# Altium PCB Mako DSP R1.3.PcbDoc (part 1 of 2)
Units mil, origin at the board's own origin, x right, y up, seen from the top; angles counter-clockwise.
Board outline 4040 x 2100 mil, 4 copper layers (Top Layer, GND, Power, Bottom Layer); 159 components, 140 nets, 610 pads, 250 vias.
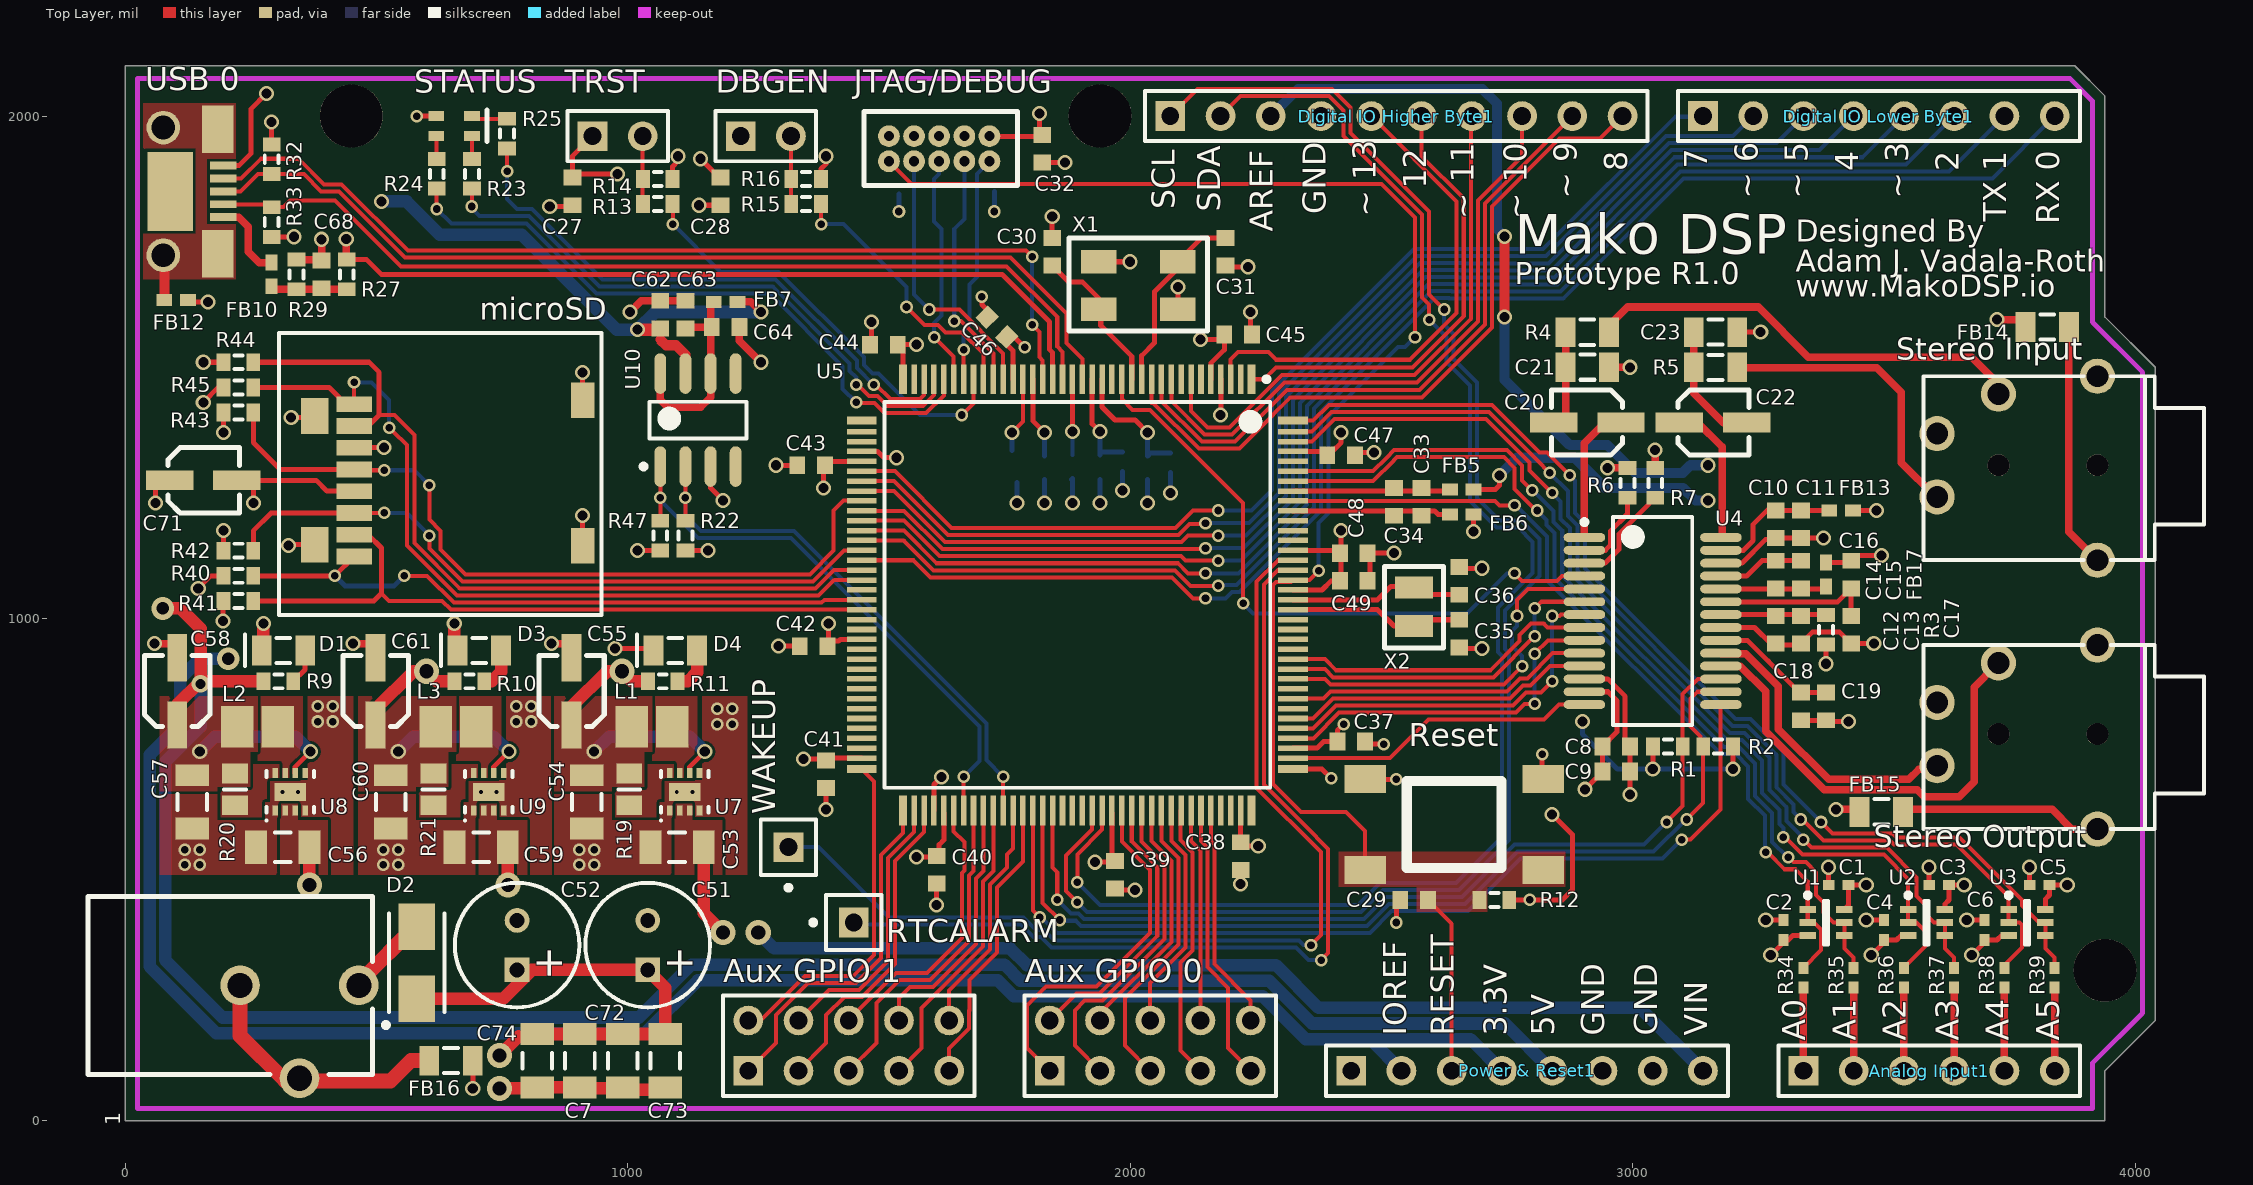
[diagram p0: Top Layer view]
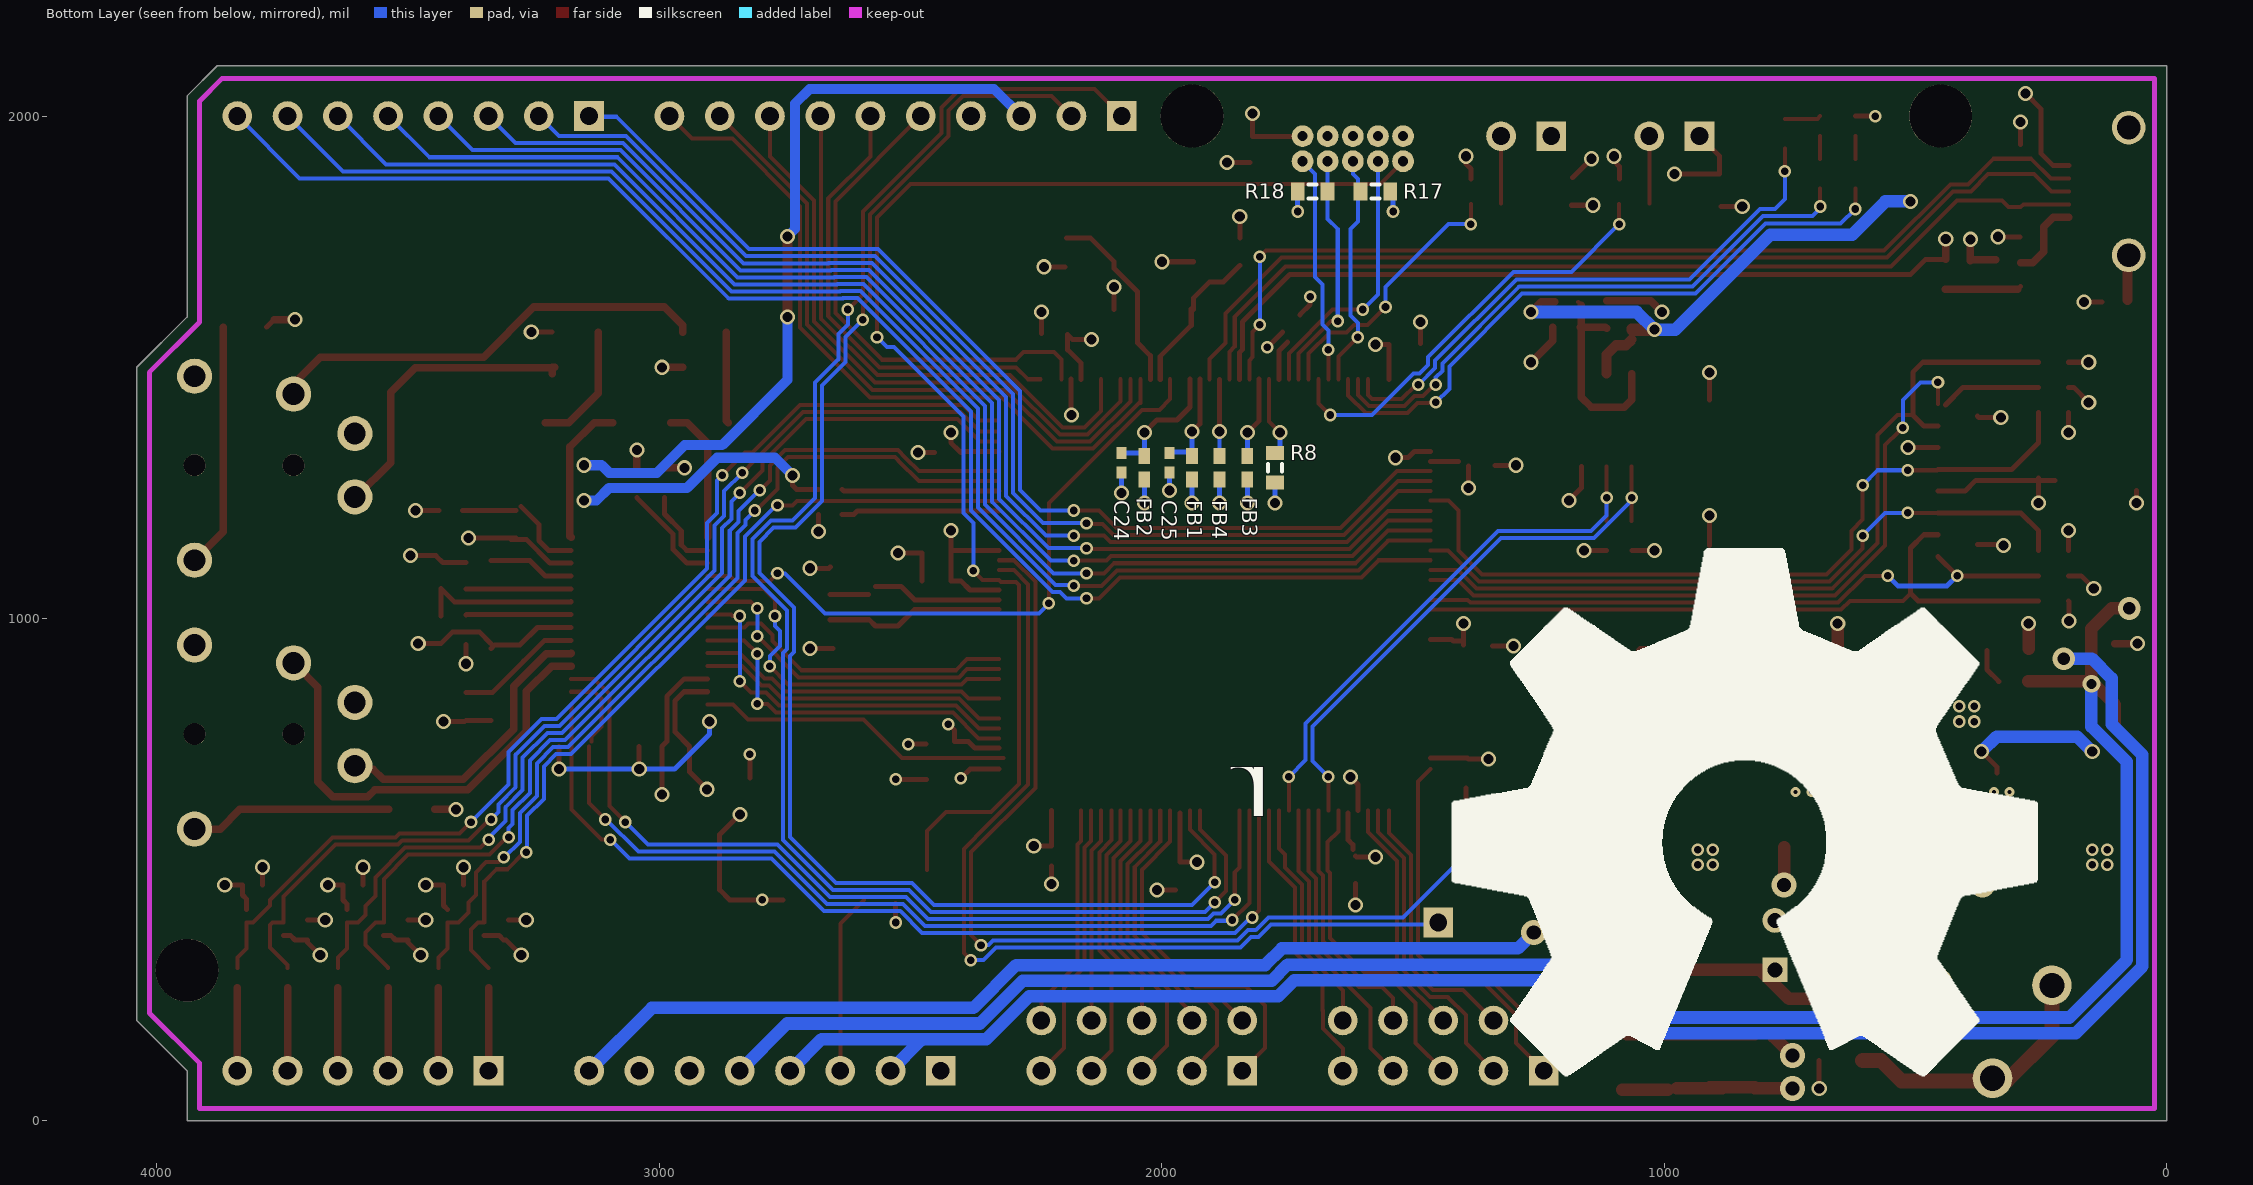
[diagram p1: Bottom Layer view, seen from below]
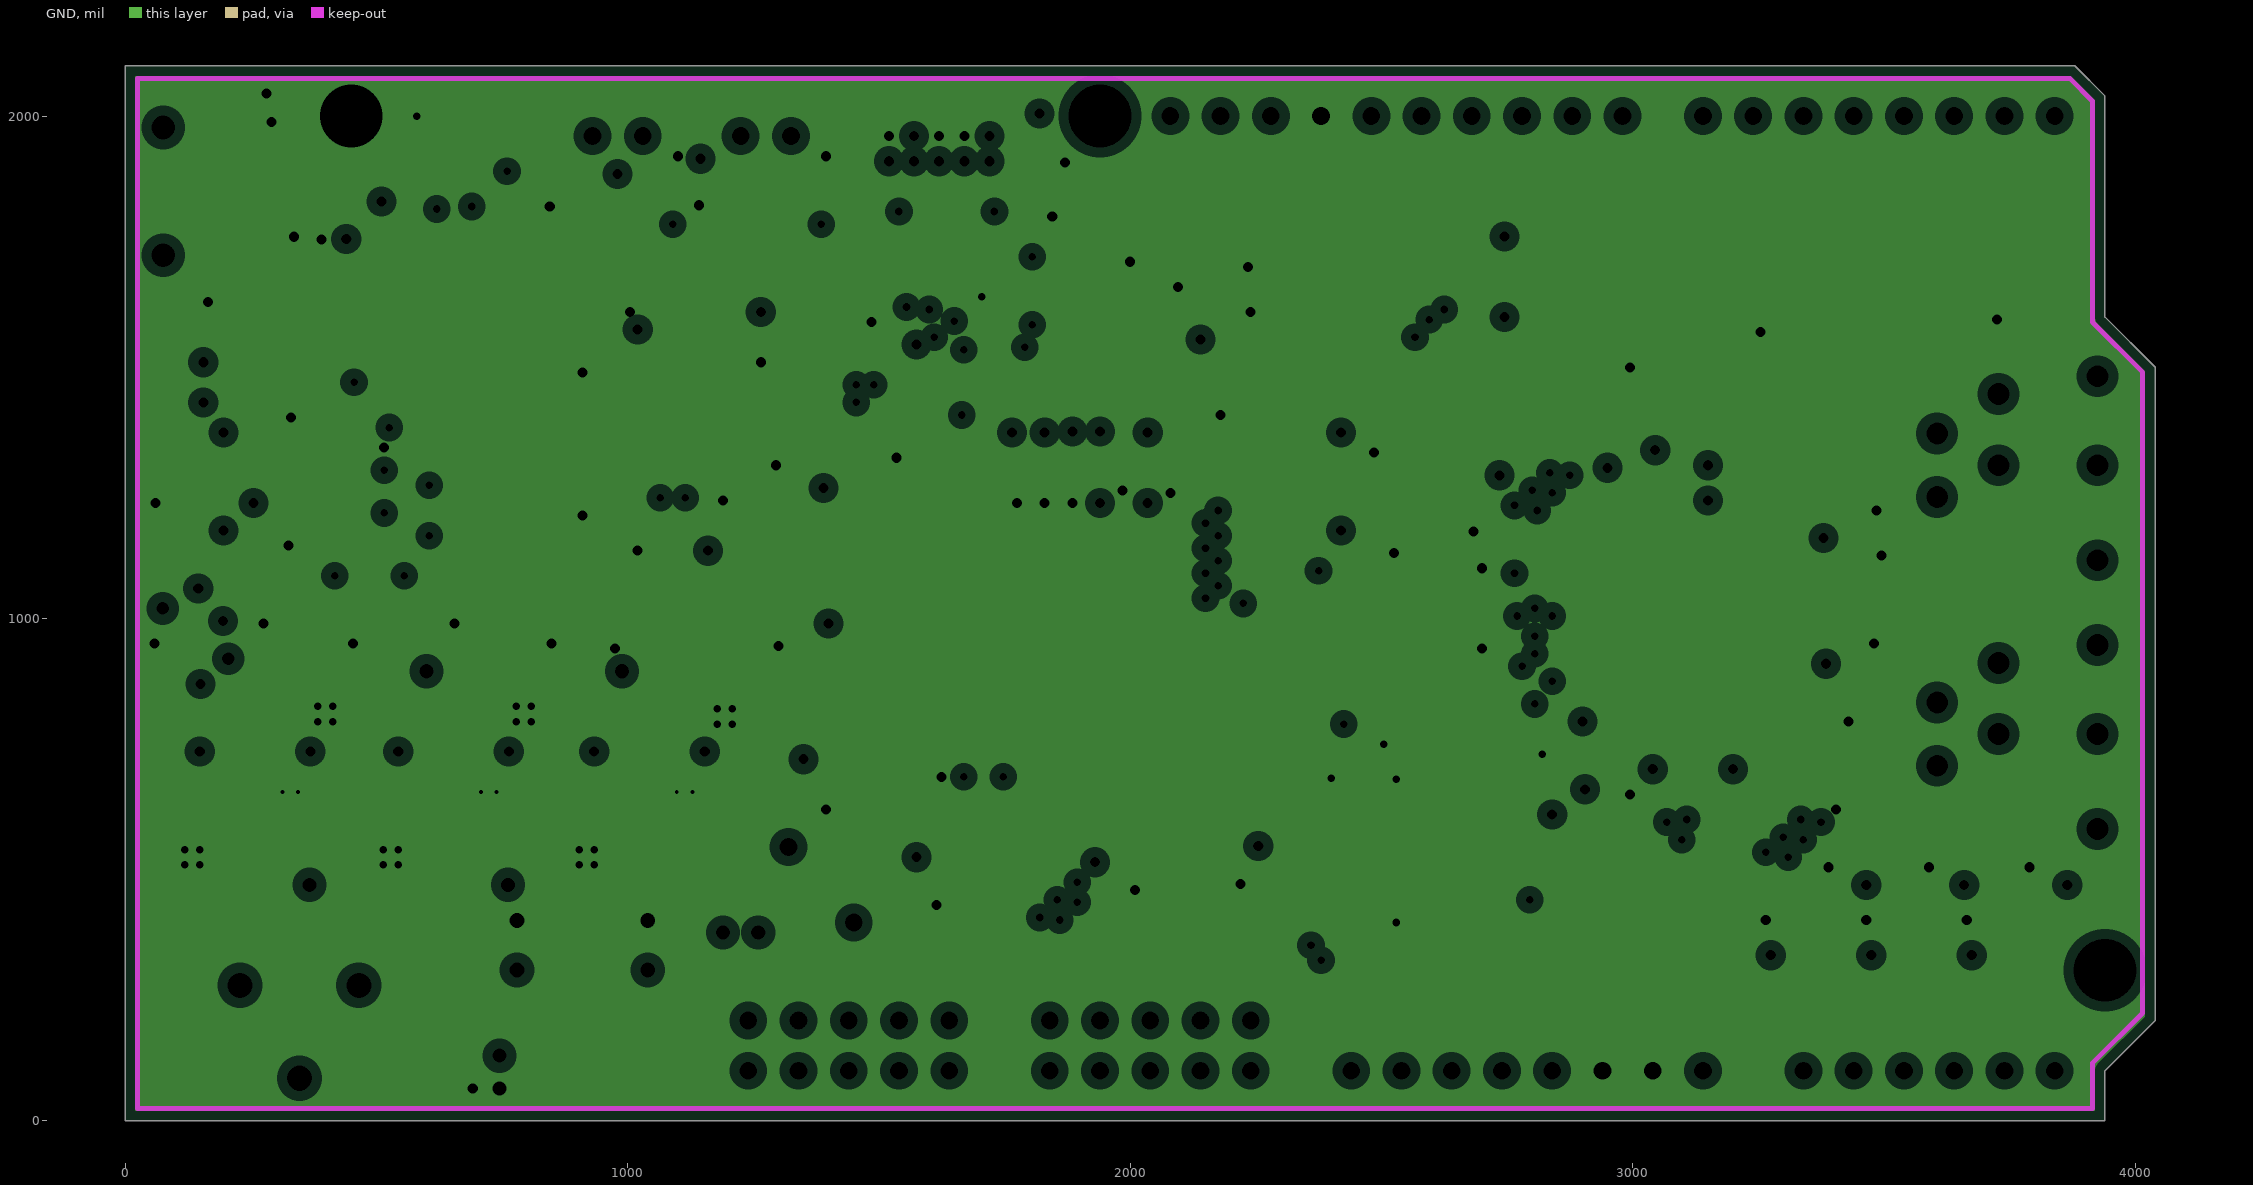
[diagram p2: GND, clearances drawn from the general rule]
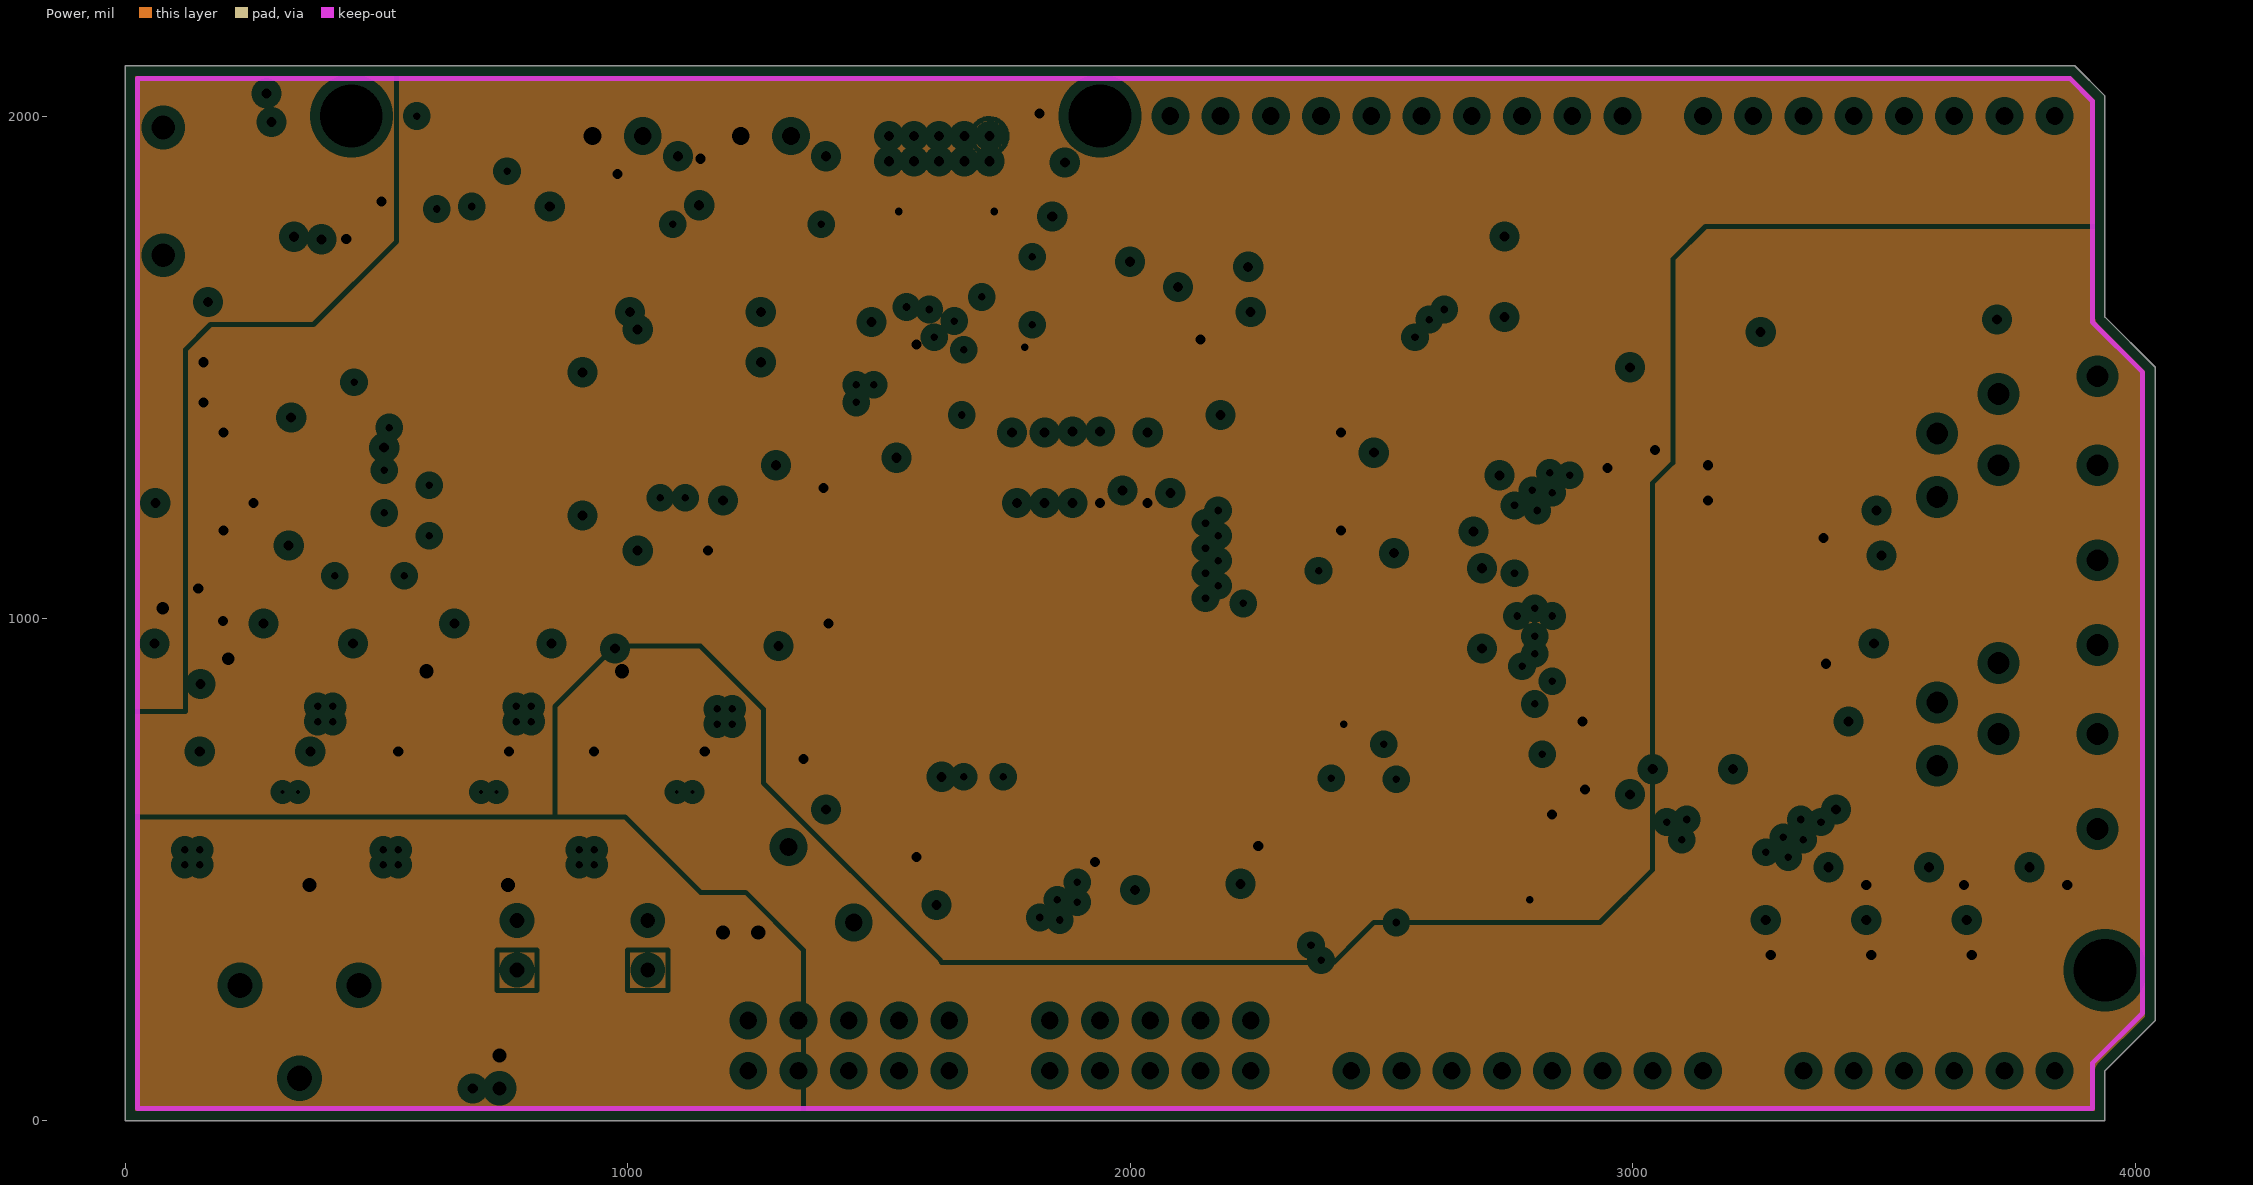
[diagram p3: Power, clearances drawn from the general rule]

## Layer stack, top to bottom
Top Layer: signal copper 1.4
Dielectric: core 12.6, FR-4, Dk 4.8
GND: plane copper 1.4, net GND
Dielectric: prepreg 12.6, FR-4, Dk 4.8
Power: plane copper 1.4, net (Multiple Nets)
Dielectric: core 12.6, FR-4, Dk 4.8
Bottom Layer: signal copper 1.4

## Board outline
0,0 0,2100 3880,2100 3940,2040 3940,1600 4040,1500 4040,200 3940,100 3940,0

## Design rules (kind name [scope] priority, off if disabled: settings)
Clearance [All] p1: gap=6
ComponentClearance [All] p1: gap=0 collisioncheckmode=3 verticalgap=10 showdistances=FALSE
DiffPairsRouting [All] p1: maxlimit=10 minlimit=10 mostfreqgap=10 maxuncoupledlength=500
FanoutControl Fanout_SOIC [(InComponent('U8') AND InComponent('U7'))] p3: bgadir=Out bgaviamode=Centered fanoutstyle=Staggered fanoutdirection=Alternating viagrid=1 // Fanout_SOIC (Default Rule)
FanoutControl Fanout_Small [All] p4: bgadir=Out bgaviamode=Centered fanoutstyle=Auto fanoutdirection=Alternating viagrid=1 // Fanout_Small (Default Rule)
HoleSize [All] p1: absolutevalues=TRUE maxlimit=120 minlimit=1 maxpercent=80.000 minpercent=20.000
MinimumSolderMaskSliver [All] p1 off: minsoldermaskwidth=10
PlaneClearance [All] p1: clearance=20
PlaneConnect [All] p1: planeconnectstyle=Direct reliefexpansion=20 reliefentries=4 reliefconductorwidth=10 reliefairgap=10
PolygonConnect [All] p1: connectstyle=Direct reliefconductorwidth=45 reliefentries=4 polygonreliefangle="90 Angle" airgapwidth=10
RoutingVias [All] p1: holewidth=15 width=25 viastyle="Through Hole" minholewidth=15 minwidth=25 maxholewidth=28 maxwidth=50
SilkToSilkClearance [All] p1 off: silktosilkclearance=10
SilkToSolderMaskClearance SilkscreenOverComponentPads [IsPad] p1 off: minsilkscreentomaskgap=10 clearancetoexposedcopper=TRUE
SolderMaskExpansion [All] p1: expansion=4
Width [All] p1: maxlimit=30 minlimit=6 preferedwidth=6 minimp=50.000000 maximp=50.000000 favimp=50.000000
18 further rules are at their usual default settings.

## Classes and differential pairs
component class "Mako DSP Power R1.2": 1 12VDC/VCCIN C7 C51 C52 C53 C54 C55 C56 C57 C58 C59 C60 C61 C72 C73 C74 D1 D2 D3 D4 D? FB16 L1 L2 L3 L? R9 R10 R11 R19 R20 R21 U7 U8 U9
component class "Mako DSP Arduio IO R1.2": "Analog Input1" "Analog Input?" "Aux GPIO 0" "Aux GPIO 1" C1 C2 C3 C4 C5 C6 "Digital IO Higher Byte1" "Digital IO Higher Byte?" "Digital IO Lower Byte1" "Digital IO Lower Byte?" "Power & Reset1" "Power & Reset?" R34 R35 R36 R37 R38 R39 SSP? U1 U2 U3
component class "Mako DSP Audio Codec R1.2": C8 C9 C10 C11 C12 C13 C14 C15 C16 C17 C18 C19 C20 C21 C22 C23 FB13 FB14 FB15 FB17 R1 R2 R3 R4 R5 R6 R7 "Stereo Input" "Stereo Input?" "Stereo Output" "Stereo Output?" U4
component class "Mako DSP Main R1.2": C24 C25 C27 C28 C29 C30 C31 C32 C33 C34 C35 C36 C37 C38 C39 C40 C41 C42 C43 C44 C45 C46 C47 C48 C49 C71 DBGEN FB1 FB2 FB3 FB4 FB5 FB6 "ISP PGM" JTAG/DEBUG microSD R8 R12 R13 R14 R15 R16 R17 R18 R23 R24 R25 R40 R41 R42 R43 R44 R45 RESET Reset RTCALARM STATUS TRST U5 WAKEUP X1 X2
component class "Mako DSP USBR1.2": C62 C63 C64 C68 FB7 FB10 FB12 R22 R27 R29 R32 R33 R47 U10 "USB 0"
differential pair USB0: +USB0_P -USB0_N

## Components (designator, comment, footprint, x,y, rotation, side; value= is the part's Value field where it differs from the comment)
1 "Center-positive 2.1 mm power jack" PJ-102AH 465,270 r90 top
"Analog Input1" "Arduino Leonardo Analog" "Arduino Leonardo Analog" 3340,100 r0 top locked
"Aux GPIO 0" "Header 5X2" HDR2X5 1840,100 r0 top locked
"Aux GPIO 1" "Header 5X2" HDR2X5 1240,100 r0 top locked
C1 "Cap Semi" 0402 3410,470 r0 top
C2 "Cap Semi" 0402 3300,380 r270 top
C3 "Cap Semi" 0402 3610,470 r0 top
C4 "Cap Semi" 0402 3500,380 r270 top
C5 "Cap Semi" 0402 3810,470 r0 top
C6 "Cap Semi" 0402 3700,380 r270 top
C7 "Cap Semi" C1206 905,120 r90 top
C8 "Cap Semi" 1608[0603] 2967.56,745.31 r180 top
C9 "Cap Semi" 1608[0603] 2967.56,695.31 r180 top
C10 "Cap Semi" 1608[0603] 3285,1187.56 r270 top
C11 "Cap Semi" 1608[0603] 3335,1187.56 r270 top
C12 "Cap Semi" 1608[0603] 3285,977.56 r90 top
C13 "Cap Semi" 1608[0603] 3335,977.56 r90 top
C14 "Cap Semi" 1608[0603] 3285,1087.56 r90 top
C15 "Cap Semi" 1608[0603] 3335,1087.56 r90 top
C16 "Cap Semi" 1608[0603] 3435,1087.56 r270 top
C17 "Cap Semi" 1608[0603] 3435,977.56 r90 top
C18 "Cap Semi" 1608[0603] 3335,825 r90 top
C19 "Cap Semi" 1608[0603] 3385,825 r90 top
C20 "Cap Semi" "Panasonic VS B" 2910,1390 r0 top
C21 "Cap Semi" "SM 0805 - gap trimmed" 2910,1500 r180 top
C22 "Cap Semi" "Panasonic VS B" 3160,1390 r180 top
C23 "Cap Semi" "SM 0805 - gap trimmed" 3165,1570 r180 top
C24 "Cap Semi" 0402 2080,1310 r90 bottom
C25 "Cap Semi" 0402 1985,1310 r90 bottom
C27 "Cap Semi" CAPC1608L 890,1850 r90 top
C28 "Cap Semi" CAPC1608L 1185,1850 r90 top
C29 "Cap Semi" CAPC1608L 2565,440 r0 top
C30 "Cap Semi" 1608[0603] 1845,1730 r90 top
C31 "Cap Semi" 1608[0603] 2190,1730 r90 top
C32 "Cap Semi" CAPC1608L 1825,1935 r270 top
C33 "Cap Semi" 1608[0603] 2580,1232.05 r90 top
C34 "Cap Semi" 1608[0603] 2525,1232.05 r90 top
C35 "Cap Semi" 1608[0603] 2655,970 r90 top
C36 "Cap Semi" 1608[0603] 2655,1075 r270 top
C37 "Cap Semi" 1608[0603] 2440,755 r180 top
C38 "Cap Semi" 1608[0603] 2220,527.05 r90 top
C39 "Cap Semi" 1608[0603] 1970,490 r90 top
C40 "Cap Semi" 1608[0603] 1615,500 r90 top
C41 "Cap Semi" 1608[0603] 1395,690 r90 top
C42 "Cap Semi" 1608[0603] 1370,945 r0 top
C43 "Cap Semi" 1608[0603] 1365,1305 r0 top
C44 "Cap Semi" 1608[0603] 1510,1545 r0 top
C45 "Cap Semi" 1608[0603] 2215,1565 r180 top
C46 "Cap Semi" 1608[0603] 1735,1580 r315 top
C47 "Cap Semi" 1608[0603] 2420,1325 r180 top
C48 "Cap Semi" 1608[0603] 2445,1130 r180 top
C49 "Cap Semi" 1608[0603] 2445,1075 r180 top
C51 "Cap Pol1" CAPPR2.5-6.3x5 1040,350 r90 top
C52 "Cap Pol1" CAPPR2.5-6.3x5 780,350 r90 top
C53 "Cap Semi" C1206 1098.48,545 r0 top
C54 "Cap Semi" C1206 918.48,635 r90 top
C55 "Cap Semi" "Panasonic VS B" 888.48,855 r270 top
C56 "Cap Semi" C1206 313.48,545 r0 top
C57 "Cap Semi" C1206 133.48,635 r90 top
C58 "Cap Semi" "Panasonic VS B" 103.48,855 r270 top
C59 "Cap Semi" C1206 708.48,545 r0 top
C60 "Cap Semi" C1206 528.48,635 r90 top
C61 "Cap Semi" "Panasonic VS B" 498.48,855 r270 top
C62 "Cap Semi" 1608[0603] 1065,1605 r270 top
C63 "Cap Semi" 1608[0603] 1115,1605 r270 top
C64 "Cap Semi" 1608[0603] 1195,1580 r180 top
C68 "Cap Semi" 1608[0603] 390.96,1684.74 r270 top
C71 "Cap Semi" "Panasonic VS B" 155.47,1275 r180 top
C72 "Cap Semi" C1206 990,120 r90 top
C73 "Cap Semi" C1206 1075,120 r90 top
C74 "Cap Semi" C1206 820,120 r90 top
D1 "LED2" "SM 0805 polarized" 235,980 r0 top
D2 "PMEG4050EP" PMEG4050EP 580,315 r90 top
D3 "LED2" "SM 0805 polarized" 625,980 r0 top
D4 "LED2" "SM 0805 polarized" 1015,980 r0 top
DBGEN "Header 2" HDR1X2 1225,1960 r0 top (schematic designator DBGEN1)
"Digital IO Higher Byte1" "Arduino Leonardo High Byte" "Arduino Leonardo High Byte" 2080,2000 r0 top locked
"Digital IO Lower Byte1" "Arduino Leonardo Low Byte" "Arduino Leonardo Low Byte" 3140,2000 r0 top locked
FB1 "BLM15HG601SN1D" BLM18PG121SN1D 1940,1300 r90 bottom
FB2 "BLM15HG601SN1D" BLM18PG121SN1D 2035,1300 r90 bottom
FB3 "BLM15HG601SN1D" BLM18PG121SN1D 1830,1300 r270 bottom
FB4 "BLM15HG601SN1D" BLM18PG121SN1D 1885,1300 r270 bottom
FB5 "BLM15HG601SN1D" BLM18PG121SN1D 2660,1257.05 r180 top
FB6 "BLM15HG601SN1D" BLM18PG121SN1D 2660,1207.05 r180 top
FB7 "BLM15HG601SN1D" BLM18PG121SN1D 1195,1630 r0 top
FB10 "BLM15HG601SN1D" BLM18PG121SN1D 290.96,1684.74 r90 top
FB12 "BLM15HG601SN1D" BLM18PG121SN1D 101.54,1634.02 r0 top
FB13 "BLM15HG601SN1D" BLM18PG121SN1D 3415.16,1215.16 r0 top
FB14 "Ferrite" "SM 0805 - gap trimmed" 3825,1580 r180 top
FB15 "Ferrite" "SM 0805 - gap trimmed" 3495,615 r180 top
FB16 "Ferrite" "SM 0805 - gap trimmed" 648.48,120 r180 top
FB17 "BLM15HG601SN1D" BLM18PG121SN1D 3385,1087.56 r90 top
JTAG/DEBUG "S9015E-05-ND" S9015E-05-ND 1520,1960 r0 top (schematic designator JTAG/DEBUG1)
L1 "Inductor" VLS252012T-2R2M1R3 1048.48,785 r180 top
L2 "Inductor" VLS252012T-2R2M1R3 263.48,785 r180 top
L3 "Inductor" VLS252012T-2R2M1R3 658.48,785 r180 top
microSD "JAE SJ107021" "JAE SJ107021" 910.47,1275 r0 top (schematic designator SD1)
"Power & Reset1" "Arduino Leonardo Power" "Arduino Leonardo Power" 2440,100 r0 top locked
R1 "Res3" J1-0603 3070.16,745.16 r180 top
R2 "Res3" J1-0603 3170.16,745.16 r0 top
R3 "Res3" J1-0603 3385,977.56 r270 top
R4 "Res3" "SM 0805 - gap trimmed" 2910,1570 r0 top
R5 "Res3" "SM 0805 - gap trimmed" 3165,1500 r0 top
R6 "Res3" J1-0603 2990,1270 r270 top
R7 "Res3" J1-0603 3045,1270 r270 top
R8 "Res3" J1-0603 1775,1300 r90 bottom
R9 "Res3" J1-0603 305,875 r0 top
R10 "Res3" J1-0603 685,875 r0 top
R11 "Res3" J1-0603 1070,875 r0 top
R12 "Res3" J1-0603 2725,440 r0 top
R13 "Res3" J1-0603 1060,1825 r180 top
R14 "Res3" J1-0603 1060,1875 r180 top
R15 "Res3" J1-0603 1355,1825 r180 top
R16 "Res3" J1-0603 1355,1875 r180 top
R17 "Res3" J1-0603 1575,1850 r180 bottom
R18 "Res3" J1-0603 1700,1850 r0 bottom
R19 "Res3" RESC2012L 1003.48,660 r90 top
R20 "Res3" RESC2012L 218.48,660 r90 top
R21 "Res3" RESC2012L 613.48,660 r90 top
R22 "Res3" J1-0603 1115,1165 r90 top
R23 "Res3" J1-0603 690,1885 r90 top
R24 "Res3" J1-0603 620,1885 r270 top
R25 "Res3" J1-0603 760,1965 r90 top
R27 "Res3" J1-0603 440.96,1684.74 r90 top
R29 "Res3" J1-0603 340.96,1684.74 r90 top
R32 "Res3" J1-0603 291.54,1914.02 r90 top
R33 "Res3" J1-0603 291.54,1789.02 r270 top
R34 "Res3" "0402 - duplicate" 3340,285 r90 top
R35 "Res3" "0402 - duplicate" 3440,285 r90 top
R36 "Res3" "0402 - duplicate" 3540,285 r90 top
R37 "Res3" "0402 - duplicate" 3640,285 r90 top
R38 "Res3" "0402 - duplicate" 3740,285 r90 top
R39 "Res3" "0402 - duplicate" 3840,285 r90 top
R40 "Res3" J1-0603 225.47,1085 r0 top
R41 "Res3" J1-0603 225.47,1035 r0 top
R42 "Res3" J1-0603 225.47,1135 r0 top
R43 "Res3" J1-0603 225.47,1410 r0 top
R44 "Res3" J1-0603 225.47,1510 r0 top
R45 "Res3" J1-0603 225.47,1460 r0 top
R47 "Res3" J1-0603 1065,1165 r90 top
Reset "Tactile Switch" TL3301 2645,590 r90 top (schematic designator RESET1)
RTCALARM "Socket" PIN1 1450,395 r90 top (schematic designator RTCALARM1)
STATUS "APTF1616SEEZGQBDC" "RGB LED APTF1616SEEZGQBDC" 690,2000 r180 top
"Stereo Input" "CUI 43515TS" "CUI SJ-43515TS" 3925,1305 r180 top (schematic designator "Stereo Input1")
"Stereo Output" "CUI 43515TS" "CUI SJ-43515TS" 3925,770 r180 top (schematic designator "Stereo Output1")
TRST "Header 2" HDR1X2 930,1960 r0 top (schematic designator TRST1)
U1 "BAV70S SOT-363" BAV70S_SOT363 3385,395 r0 top
U2 "BAV70S SOT-363" BAV70S_SOT363 3585,395 r0 top
U3 "BAV70S SOT-363" BAV70S_SOT363 3785,395 r0 top
U4 "WM8778" WM8778 3040,995 r0 top
U5 "LPC4330FBD144" SOT486-1_V 1895,1047.05 r270 top
U7 "TPS62162SOP" DSG8-1600X900TP 1113.48,655 r90 top
U8 "TPS62162SOP" DSG8-1600X900TP 328.48,655 r90 top
U9 "TPS62162SOP" DSG8-1600X900TP 723.48,655 r90 top
U10 "LM3525" LM3525 1140,1395 r90 top
"USB 0" "DX4R005J91R5100" "Micro USB Circular Holes Only" 36.54,1849.02 r270 top (schematic designator J3)
WAKEUP "Socket" PIN1 1320,545 r180 top (schematic designator WAKEUP1)
X1 "ABM3B-12.000MHZ-B2-T" ABM3B-12.000MHZ-B2-T 2095,1710 r180 top
X2 "ABS07-32.768KHZ-T" ABS07-32.768KHZ-T 2565,985 r90 top

## Footprints (in the part's own frame and the unit in brackets; to place one, negate y for a bottom-side part, rotate by r counter-clockwise, add the part's x,y. Pads: shape width x height; smd on the part's side, far side on the other; paste and mask are expansions set on the pad)
0402 [mm] "Chip Capacitor, Body 1.0x0.5mm, IPC High Density"
  rect 0.6x0.5 smd: 1(-0.5,0) 2(0.5,0)
  body extent -0.55,-0.3 0.55,0.3, height 1.3
"0402 - duplicate" [mm] "Chip Capacitor, Body 1.0x0.5mm, IPC High Density"
  rect 0.6x0.5 smd: 1(-0.5,0) 2(0.5,0)
  body extent -0.55,-0.3 0.55,0.3, height 1.3
1608[0603] [mm] "Chip Capacitor, Body 1.6x0.8mm, IPC High Density"
  rect 0.8x0.9 smd: 1(-0.7,0) 2(0.7,0)
  body extent -0.87,-0.48 0.87,0.48, height 1.3
ABM3B-12.000MHZ-B2-T [mm] "ABM3B-12.000MHZ-B2-T 12MHZ Crystam Oscillator"
  rect 1.8x1.2 smd: 1(0,0) 2(4,0) 3(4,2.4) 4(0,2.4)
  silkscreen extent -1.5,-1.2 5.5,3.5
ABS07-32.768KHZ-T [mm] "ABS07-32.768KHZ-T Crystal Oscillator"
  rect 1.1x1.9 smd: 1(0,0) 2(1.95,0)
  silkscreen extent -1.1,-1.5 3,1.5
"Arduino Leonardo Analog" [mm] "Connector; Header; 6 Position"
  rect 1.5x1.5 hole 0.9: 1(0,0)
  round 1.5 hole 0.9: 2(2.54,0) 3(5.08,0) 4(7.62,0) 5(10.16,0) 6(12.7,0)
  silkscreen extent -1.27,-1.27 13.97,1.27
"Arduino Leonardo High Byte" [mm]
  rect 1.5x1.5 hole 0.9: 1(0,0)
  round 1.5 hole 0.9: 2(2.54,0) 3(5.08,0) 4(7.62,0) 5(10.16,0) 6(12.7,0) 7(15.24,0) 8(17.78,0) 9(20.32,0) 10(22.86,0)
  silkscreen extent -1.27,-1.27 24.13,1.27
"Arduino Leonardo Low Byte" [mm] "Connector; Header; 8 Position"
  rect 1.5x1.5 hole 0.9: 1(0,0)
  round 1.5 hole 0.9: 2(2.54,0) 3(5.08,0) 4(7.62,0) 5(10.16,0) 6(12.7,0) 7(15.24,0) 8(17.78,0)
  silkscreen extent -1.27,-1.27 19.05,1.27
"Arduino Leonardo Power" [mm] "Connector; Header; 8 Position"
  rect 1.5x1.5 hole 0.9: 1(0,0)
  round 1.5 hole 0.9: 2(2.54,0) 3(5.08,0) 4(7.62,0) 5(10.16,0) 6(12.7,0) 7(15.24,0) 8(17.78,0)
  silkscreen extent -1.27,-1.27 19.05,1.27
BAV70S_SOT363 [mm] "SOT23, 6-Leads, Body 2.2x2.2mm (max), Pitch 0.65mm, IPC Medium Density"
  rect 0.85x0.35 smd: 1(-0.925,0.65) 2(-0.925,0) 3(-0.925,-0.65) 4(0.925,-0.65) 5(0.925,0) 6(0.925,0.65)
  silkscreen extent -1.05,-1.1 0.1,1.5, body extent -0.67,-1.1 0.67,1.1, height 1.1
BLM18PG121SN1D [mm] "Chip Inductor, 2-Leads, Body 1.0x0.5mm, IPC Medium Density"
  rect 0.8x0.6 smd: 1(-0.6,0) 2(0.6,0)
  body extent -0.52,-0.28 0.53,0.27, height 0.6
C1206 [mm] "Chip Capacitor, Body 3.2x1.6mm, IPC High Density"
  rect 1.1x1.7 smd: 1(-1.35,0) 2(1.35,0)
  silkscreen extent -0.4,-0.75 0.4,0.75, body extent -1.7,-0.9 1.7,0.9, height 1.3
CAPC1608L [mm] "Chip Capacitor, Body 1.6x0.8mm, IPC High Density"
  rect 0.8x0.9 smd: 1(-0.7,0) 2(0.7,0)
  body extent -0.87,-0.48 0.87,0.48, height 0.85
CAPPR2.5-6.3x5 [mm] "Capacitor, Electrolytic, Radial; Body 6.3 x 5 mm (Dia.xH typ); Pin Spacing 2.5 mm (typ)"
  rect 1.25x1.25 hole 0.75: 1(-1.25,0)
  round 1.25 hole 0.75: 2(1.25,0)
  silkscreen extent -3.15,-3.15 3.15,3.15
"CUI SJ-43515TS" [mm]
  round 1.778 hole 1.1: 1(8.1,1.6) 3(8.1,-1.6) 4(5,-3.6) 5(0,4.8) 6(0,-4.5)
  round 1.1 hole 1.1: ""(0,0) ""(5,0)
  silkscreen extent -5.4,-4.5 8.8,4.8
DSG8-1600X900TP [mm] "SON, 8-Leads, Body 2x2mm, Pitch 0.5mm, Thermal Pad 1.6x0.9mm, TI Recommended"
  rect 0.5x0.28 smd paste-0.14 mask+0.07: 1(-0.95,0.75) 2(-0.95,0.25) 3(-0.95,-0.25) 4(-0.95,-0.75) 5(0.95,-0.75) 6(0.95,-0.25) 7(0.95,0.25) 8(0.95,0.75)
  rect 0.9x1.6 smd paste-0.45 mask+0.07: 9(0,0)
  silkscreen extent -1.5,-1.2 1.05,1.25, body extent -1.05,-1.05 1.05,1.05, height 0.8
HDR1X2 [mm] "Connector; Header; 2 Position"
  rect 1.5x1.5 hole 0.9: 1(0,0)
  round 1.5 hole 0.9: 2(2.54,0)
  silkscreen extent -1.27,-1.27 3.81,1.27
HDR2X5 [mm] "Connector; Header; 5x2 Position"
  rect 1.5x1.5 hole 0.9: 1(0,0)
  round 1.5 hole 0.9: 2(0,2.54) 3(2.54,0) 4(2.54,2.54) 5(5.08,0) 6(5.08,2.54) 7(7.62,0) 8(7.62,2.54) 9(10.16,0) 10(10.16,2.54)
  silkscreen extent -1.27,-1.27 11.43,3.81
J1-0603 [mm] "Chip Resistor, Body 1.6x0.8mm, IPC High Density"
  rect 0.7x0.9 smd: 1(-0.75,0) 2(0.75,0)
  silkscreen extent -0.2,-0.35 0.2,0.35, body extent -0.85,-0.48 0.85,0.48, height 0.9
"JAE SJ107021" [mm] "MicroSD card socket"
  rect 1.8x0.8 smd: 1(-11.55,-3.85) 2(-11.55,-2.75) 3(-11.55,-1.65) 4(-11.55,-0.55) 5(-11.55,0.55) 6(-11.55,1.65) 7(-11.55,2.75) 8(-11.55,3.85)
  rect 1.2x1.8 smd: 9(0,-3.3) 10(0,4.05)
  rect 1.4x1.8 smd: 11(-13.55,-3.25) 12(-13.55,3.25)
  silkscreen extent -15.35,-6.8 0.95,7.45, body extent -15.25,-6.75 1,7.5, height 2
LM3525 [mm]
  oval 2.05x0.6 smd: 1(-2.35,1.905) 2(-2.35,0.635) 3(-2.35,-0.635) 4(-2.35,-1.905) 5(2.35,-1.905) 6(2.35,-0.635) 7(2.35,0.635) 8(2.35,1.905)
  silkscreen extent -2.47,-2.45 0.92,2.88, body extent -1.95,-2.45 1.95,2.45, height 1.45
"Micro USB Circular Holes Only" [mm]
  rect 0.4x1.35 smd: 1(1.275,4.025) 2(0.625,4.025) 3(-0.025,4.025) 4(-0.675,4.025) 5(-1.325,4.025)
  rect 2.4x1.6 smd: 6(3.125,3.75) 9(-3.175,3.75)
  round 1.7 hole 1.2: 7(3.2,1) 8(-3.25,1)
  rect 4x2.3 smd: GND(-0.025,1.35)
  body extent -4.1,-1.64 4.1,3.79, height 2.73
"Panasonic VS B" [mm]
  rect 2.4x1 smd: 1(1.7,0) 2(-1.7,0)
  silkscreen extent -1.83,-1.65 1.78,1.65
PIN1 [mm] "Connector; Plug"
  rect 1.5x1.5 hole 0.9: 1(0,0)
  silkscreen extent -1.4,-1.4 1.4,2.17
PJ-102AH [mm] "Center positive 2.1 mm power jack"
  round 2 hole 1.27: 1(0,0) 2(0,6) 3(-4.7,3)
  silkscreen extent -4.5,-0.7 4.5,13.7, body extent -5.8,-0.7 4.5,13.7, height 11
PMEG4050EP [mm] "PMEG4050EP NXP SMD Schottky Diode"
  rect 2.35x1.85 smd: 1(-1.825,0) 2(1.825,0)
  silkscreen extent -3.27,-1.4 2.5,1.67, body extent -2.5,-1.35 2.5,1.35, height 1.1
RESC2012L [mm] "Chip Resistor, Body 2.0x1.3mm, IPC High Density"
  rect 1x1.3 smd: 1(-0.8,0) 2(0.8,0)
  silkscreen extent 0,-0.55 0,0.55, body extent -1.07,-0.7 1.07,0.7, height 0.65
"RGB LED APTF1616SEEZGQBDC" [mm] "RGB LED"
  rect 0.8x0.5 smd: 1(1.8,0) 2(0,0) 3(0,1) 4(1.8,1)
  silkscreen extent -0.77,-0.3 -0.77,1.28
S9015E-05-ND [mm] "10 Pin Cortex JTAG Debug Header"
  round 1.1 hole 0.508: 1(5.08,0) 2(5.08,-1.27) 3(3.81,0) 4(3.81,-1.27) 5(2.54,0) 6(2.54,-1.27) 7(1.27,0) 8(1.27,-1.27) 9(0,0) 10(0,-1.27)
  round 0.5 on Top Overlay: 1(7,0.8)
  silkscreen extent -1.25,-2.5 6.5,1.25
"SM 0805 - gap trimmed" [mm]
  rect 1x1.5 smd: 1(-1.1,0) 2(1.1,0)
  silkscreen extent -0.36,-0.64 0.35,0.63
"SM 0805 polarized" [mm]
  rect 1x1.5 smd: 1(0.93,-1.105) 2(3.13,-1.105)
  silkscreen extent 0.1,-1.9 2.38,-0.3
SOT486-1_V [mm] "Thin QFP, 144-Leads, Body 20x20mm, Pitch 0.5mm, NXP Recommended"
  rect 1.5x0.4 smd: 1(-10.9,8.81) 36(-10.9,-8.81) 73(10.9,-8.81) 108(10.9,8.81)
  rect 1.5x0.28 smd: 2(-10.9,8.25) 3(-10.9,7.75) 4(-10.9,7.25) 5(-10.9,6.75) 6(-10.9,6.25) 7(-10.9,5.75) 8(-10.9,5.25) 9(-10.9,4.75) 10(-10.9,4.25) 11(-10.9,3.75) 12(-10.9,3.25) 13(-10.9,2.75) 14(-10.9,2.25) 15(-10.9,1.75) 16(-10.9,1.25) 17(-10.9,0.75) 18(-10.9,0.25) 19(-10.9,-0.25) 20(-10.9,-0.75) 21(-10.9,-1.25) 22(-10.9,-1.75) 23(-10.9,-2.25) 24(-10.9,-2.75) 25(-10.9,-3.25) 26(-10.9,-3.75) 27(-10.9,-4.25) 28(-10.9,-4.75) 29(-10.9,-5.25) 30(-10.9,-5.75) 31(-10.9,-6.25) 32(-10.9,-6.75) 33(-10.9,-7.25) 34(-10.9,-7.75) 35(-10.9,-8.25) 74(10.9,-8.25) 75(10.9,-7.75) 76(10.9,-7.25) 77(10.9,-6.75) 78(10.9,-6.25) 79(10.9,-5.75) 80(10.9,-5.25) 81(10.9,-4.75) 82(10.9,-4.25) 83(10.9,-3.75) 84(10.9,-3.25) 85(10.9,-2.75) 86(10.9,-2.25) 87(10.9,-1.75) 88(10.9,-1.25) 89(10.9,-0.75) 90(10.9,-0.25) 91(10.9,0.25) 92(10.9,0.75) 93(10.9,1.25) 94(10.9,1.75) 95(10.9,2.25) 96(10.9,2.75) 97(10.9,3.25) 98(10.9,3.75) 99(10.9,4.25) 100(10.9,4.75) 101(10.9,5.25) 102(10.9,5.75) 103(10.9,6.25) 104(10.9,6.75) 105(10.9,7.25) 106(10.9,7.75) 107(10.9,8.25)
  rect 0.4x1.5 smd: 37(-8.81,-10.9) 72(8.81,-10.9) 109(8.81,10.9) 144(-8.81,10.9)
  rect 0.28x1.5 smd: 38(-8.25,-10.9) 39(-7.75,-10.9) 40(-7.25,-10.9) 41(-6.75,-10.9) 42(-6.25,-10.9) 43(-5.75,-10.9) 44(-5.25,-10.9) 45(-4.75,-10.9) 46(-4.25,-10.9) 47(-3.75,-10.9) 48(-3.25,-10.9) 49(-2.75,-10.9) 50(-2.25,-10.9) 51(-1.75,-10.9) 52(-1.25,-10.9) 53(-0.75,-10.9) 54(-0.25,-10.9) 55(0.25,-10.9) 56(0.75,-10.9) 57(1.25,-10.9) 58(1.75,-10.9) 59(2.25,-10.9) 60(2.75,-10.9) 61(3.25,-10.9) 62(3.75,-10.9) 63(4.25,-10.9) 64(4.75,-10.9) 65(5.25,-10.9) 66(5.75,-10.9) 67(6.25,-10.9) 68(6.75,-10.9) 69(7.25,-10.9) 70(7.75,-10.9) 71(8.25,-10.9) 110(8.25,10.9) 111(7.75,10.9) 112(7.25,10.9) 113(6.75,10.9) 114(6.25,10.9) 115(5.75,10.9) 116(5.25,10.9) 117(4.75,10.9) 118(4.25,10.9) 119(3.75,10.9) 120(3.25,10.9) 121(2.75,10.9) 122(2.25,10.9) 123(1.75,10.9) 124(1.25,10.9) 125(0.75,10.9) 126(0.25,10.9) 127(-0.25,10.9) 128(-0.75,10.9) 129(-1.25,10.9) 130(-1.75,10.9) 131(-2.25,10.9) 132(-2.75,10.9) 133(-3.25,10.9) 134(-3.75,10.9) 135(-4.25,10.9) 136(-4.75,10.9) 137(-5.25,10.9) 138(-5.75,10.9) 139(-6.25,10.9) 140(-6.75,10.9) 141(-7.25,10.9) 142(-7.75,10.9) 143(-8.25,10.9)
  silkscreen extent -11.02,-9.75 9.75,9.75, body extent -10,-10 10,10, height 1.6
TL3301 [mm]
  rect 1.4x2.1 smd: 1(-2.3,4.5) 1(-2.3,-4.5) 2(2.3,4.5) 2(2.3,-4.5)
  silkscreen extent -2.2,-2.4 2.2,2.4
VLS252012T-2R2M1R3 [mm] "Precision Wire Wound Inductor, 2-Leads, Body 2.5x2.0mm, IPC Medium Density"
  rect 1.65x2.1 smd: 1(-1.025,0) 2(1.025,0)
  body extent -1.3,-1.05 1.3,1.05, height 1.2
WM8778 [mm] "SOP, 28 Pin Wolfson Audio WM8778 Audio Codec"
  oval 2.1x0.45 smd: 1(-3.45,4.225) 2(-3.45,3.575) 3(-3.45,2.925) 4(-3.45,2.275) 5(-3.45,1.625) 6(-3.45,0.975) 7(-3.45,0.325) 8(-3.45,-0.325) 9(-3.45,-0.975) 10(-3.45,-1.625) 11(-3.45,-2.275) 12(-3.45,-2.925) 13(-3.45,-3.575) 14(-3.45,-4.225) 15(3.45,-4.225) 16(3.45,-3.575) 17(3.45,-2.925) 18(3.45,-2.275) 19(3.45,-1.625) 20(3.45,-0.975) 21(3.45,-0.325) 22(3.45,0.325) 23(3.45,0.975) 24(3.45,1.625) 25(3.45,2.275) 26(3.45,2.925) 27(3.45,3.575) 28(3.45,4.225)
  silkscreen extent -3.57,-5.25 2,5.25, body extent -2.8,-5.25 2.8,5.25, height 2

## Part data
1: library part PWR2.5, "Power jack"
"Aux GPIO 0" "Aux GPIO 1": "Header, 5-Pin, Dual row"
C1 C2 C3 C4 C5 C6 C7 C8 C9 C10 C11 C12 C13 C14 C15 C16 C17 C18 C19 C20 C21 C22 C23 C24 C25 C27 C28 C29 C30 C31 C32 C33 C34 C35 C36 C37 C38 C39 C40 C41 C42 C43 C44 C45 C46 C47 C48 C49 C53 C54 C55 C56 C57 C58 C59 C60 C61 C62 C63 C64 C68 C71 C72 C73 C74: "Capacitor (Semiconductor SIM Model)"
C51 C52: "Polarized Capacitor (Radial)"
D1 D3 D4: "Typical RED, GREEN, YELLOW, AMBER GaAs LED"
D2: library part Diode, "Default Diode"
DBGEN TRST: "Header, 2-Pin"
FB14 FB15 FB16: library part Inductor, "Inductor"
microSD: library part "JAE SJ107021 microSD Card Socket"
R1 R2 R3 R4 R5 R6 R7 R8 R9 R10 R11 R12 R13 R14 R15 R16 R17 R18 R19 R20 R21 R22 R23 R24 R25 R27 R29 R32 R33 R34 R35 R36 R37 R38 R39 R40 R41 R42 R43 R44 R45 R47: "Resistor"
STATUS: library part "RGB LED APTF1616SEEZGQBDC", "RGB LED"
U5: "32-bit ARM Cortex-M4 MCU, 264 kB SRAM, 2 HS USB with on-chip PHY, Ethernet, CAN, AES, SPIFI, SGPIO, SCT, 144-Pin LQFP"
"USB 0": library part "Micro USB", "Micro USB Jack B"
X2: "ABS07-32.768KHZ-T RTC Crystal Oscillator"

## Free pads (board coordinates)
  round 125.1 hole 125.1: ""(450,2000) ""(1940,2000) ""(3940,300)

## Via types
v1: diameter 30, hole 20, Top Layer to Bottom Layer, 125 vias
v2: diameter 25, hole 15, Top Layer to Bottom Layer, 108 vias
v3: diameter 50, hole 28, Top Layer to Bottom Layer, 8 vias
v4: diameter 19.68, hole 7.87, Top Layer to Bottom Layer, 6 vias
v5: diameter 45, hole 25, Top Layer to Bottom Layer, 2 vias
v6: diameter 35, hole 20, Top Layer to Bottom Layer, 1 vias

## Nets (pads, with @x,y where several pads share a name; then routed paths per layer and width w, separated by ;. In a path a pad name is that pad's centre, name@x,y a point inside that pad or via, vN(x,y) a via of type N, cw(c..) or ccw(c..) an arc to the next point about the centre after c; other vN are vias at no path point)
ADC_RX_MCLK: U4.9 U5.112 | length 719.4
  Top Layer w8: U5.112@2324.13,761.61 2364.57,761.61 2416,813.05 2768.05,813.05 2785,830 v2(2805,830) ; v2(2805,930) 2831.61,956.61 U4.9@2904.17,956.61
  Bottom Layer w8: v2(2805,830) v2(2805,930)
ADC_RX_SCK: U4.8 U5.120 | length 637.8
  Top Layer w8: U5.120@2324.13,919.09 2387.95,919.09 2410,897.05 2717.05,897.05 2775,955 2775,966.82 2798.18,990 2823.18,990 2830.98,982.2 U4.8@2904.17,982.2
ADC_RX_SDA: U4.10 U5.116 | length 617.6
  Top Layer w8: U5.116@2324.13,840.35 2324.83,841.05 2384.4,841.05 2398.4,855.05 2750.05,855.05 2775.5,880.5 2790.5,880.5 2841.02,931.02 U4.10@2904.17,931.02
ADC_RX_WS: U4.11 U5.114 | length 623.3
  Top Layer w8: U5.114@2324.13,800.98 2364.14,800.98 2404.2,841.05 2756.05,841.05 2781.5,866.5 2796.5,866.5 2835.43,905.43 U4.11@2904.17,905.43
AVDD: "Digital IO Higher Byte1.3" C1.2 C2.2 C3.2 C4.2 C5.2 C6.2 C10.2 C11.2 C54.2 C55.1 FB5.1 L1.2 R3.2 R11.1 R19.2 U1.3 U1.6 U2.3 U2.6 U3.3 U3.6 U4.26 U7.6 | length 3401.4
  Top Layer w10: U7.6@1123.32,692.4 1123.32,704.84 v1(1153.48,735) ; FB5.1@2683.62,1257.05 2727.05,1257.05 2735,1265 v1(2735,1285) ; U4.26@3175.83,1110.16 3217.6,1110.16 3265,1157.56 C10.2@3295,1157.56 ; v1(3275,330) 3305,360 3310,360 3319.41,369.41 U1.3@3348.58,369.41 ; C10.2@3285,1160 C11.2@3335,1160 3335.16,1160.16 v1(3380.16,1160.16) ; v1(3385,910) R3.2@3385,948.03 ; U1.6@3421.42,420.59 3429.69,428.86 C1.2@3429.69,470 v1(3465,470) ; v1(3475,330) 3500,355 C4.2@3500,360.31 3525.31,360.31 3534.41,369.41 U2.3@3548.58,369.41 ; U2.6@3621.42,420.59 3621.42,431.42 3629.69,439.69 C3.2@3629.69,470 v1(3660,470) ; v1(3675,330) 3700,355 C6.2@3700,360.31 3725.31,360.31 3734.41,369.41 U3.3@3748.58,369.41 ; U3.6@3821.42,420.59 3821.42,441.42 3829.69,449.69 C5.2@3829.69,470 v1(3865,470)
  Top Layer w20: v1(2745,1600) v1(2745,1760)
  Top Layer w25: C55.1@888.48,788.07 888.48,825 958.48,895 v3(988.48,895) 1008.48,875 R11.1@1040.47,875
  Bottom Layer w20: 2280,2000 2334,2054 2701,2054 2730,2025 2730,1775 v1(2745,1760) ; v1(2735,1285) 2770,1320 2885,1320 2944.84,1260.16 3099.84,1260.16 3125,1235 v1(3150,1235) ; v1(2745,1600) 2745,1475 2875,1345 2950,1345 3005,1290 3100,1290 3115,1305 v1(3150,1305)
  Bottom Layer w25: v1(933.48,735) 963.48,765 1123.48,765 v1(1153.48,735)
DAC_TX_MLCK: U4.5 U5.118 | length 762.8
  Top Layer w8: U5.118@2324.13,879.72 2387.73,879.72 2398.4,869.05 2744.05,869.05 v2(2780,905) ; v2(2770,1005) 2770,1036.82 2792.16,1058.98 U4.5@2904.17,1058.98
  Bottom Layer w8: v2(2770,1005) 2770,985 2760,975 2760,945 2780,925 v2(2780,905)
DAC_TX_SCK: U4.4 U5.14 | length 1307.5
  Top Layer w8: U5.14@1983.58,1476.18 1983.58,1436.42 2005,1415 2040,1415 2225,1230 v2(2225,1030) ; v2(2765,1090) 2780,1075 2850,1075 2859.57,1084.57 U4.4@2904.17,1084.57
  Bottom Layer w8: v2(2225,1030) 2245,1010 2670,1010 2750,1090 v2@2775,1090
DAC_TX_SDA: U4.6 U5.119 | length 681.3
  Top Layer w8: U5.119@2324.13,899.41 2387.84,899.41 2404.2,883.05 2723.05,883.05 v2(2805,965) ; v2(2805,1020) 2818.39,1033.39 U4.6@2904.17,1033.39
  Bottom Layer w8: v2(2805,965) v2(2805,1020)
DAC_TX_WS: U4.7 U5.113 | length 750
  Top Layer w8: U5.113@2324.13,781.3 2364.25,781.3 2410,827.05 2762.05,827.05 2787.5,852.5 2817.5,852.5 v2(2840,875) ; v2(2840,1005) 2855,1005 2857.8,1007.8 U4.7@2904.17,1007.8
  Bottom Layer w8: v2(2840,875) v2(2840,1005)
DIGI_0: "Digital IO Lower Byte1.8" U5.51 | length 2918.9
  Top Layer w8: U5.51@1465.87,1115.94 1569.06,1115.94 1603,1082 2083.4,1082 2125.4,1040 v2(2150,1040)
  Bottom Layer w8: v2(2150,1040) 2190,1040 2202.5,1052.5 2217.5,1052.5 2380,1215 2380,1411.82 2605.68,1637.5 2634.32,1637.5 2634.82,1637 2862,1637 3101,1876 3716,1876 3840,2000
DIGI_1: "Digital IO Lower Byte1.7" U5.49 | length 2814.5
  Top Layer w8: U5.49@1465.87,1155.31 1549.48,1155.31 1608.8,1096 2089.2,1096 2120.2,1065 v2(2175,1065)
  Bottom Layer w8: v2(2175,1065) 2176.5,1066.5 2211.7,1066.5 2366,1220.8 2366,1417.62 2599.88,1651.5 2640.12,1651.5 2640.62,1651 2856.2,1651 3095.2,1890 3630,1890 3740,2000
DIGI_2: "Digital IO Lower Byte1.6" U5.48 | length 2702
  Top Layer w8: U5.48@1465.87,1175 1549.6,1175 1614.6,1110 2095,1110 2115,1090 v2(2150,1090)
  Bottom Layer w8: v2(2150,1090) 2215.4,1090 2352,1226.6 2352,1423.42 2594.08,1665.5 2645.92,1665.5 2646.42,1665 2850.4,1665 3089.4,1904 3544,1904 3640,2000
DIGI_4: "Digital IO Lower Byte1.4" U5.46 | length 2478.5
  Top Layer w8: U5.46@1465.87,1214.37 1549.83,1214.37 1626.2,1138 2148,1138 v2(2150,1140)
  Bottom Layer w8: v2(2150,1140) 2225.8,1140 2324,1238.2 2324,1435.02 2582.48,1693.5 2657.52,1693.5 2658.02,1693 2838.8,1693 3077.8,1932 3372,1932 3440,2000
DIGI_7: "Digital IO Lower Byte1.1" U5.42 | length 2177.2
  Top Layer w8: U5.42@1465.87,1293.11 1531.89,1293.11 1645,1180 2090.4,1180 2125.4,1215 v2(2175,1215)
  Bottom Layer w8: v2(2175,1215) 2241.41,1215 2282,1255.59 2282,1452.41 2565.09,1735.5 2674.91,1735.5 2675.41,1735 2821.41,1735 3085,1998.59 3140,1998.59 3140,2000
DIGI_8: "Digital IO Higher Byte1.10" U5.11 | length 1438.4
  Top Layer w8: U5.11@2042.64,1476.18 2042.64,1429 2045.8,1429 2136.8,1338 2218,1338 2284.61,1404.61 2284.61,1405.91 2318.69,1440 2580.81,1440 2720,1579.19 2720,1820.2 2854.8,1955 2935,1955 2980,2000
DVDD: "Power & Reset1.2" "Power & Reset1.4" C8.2 C9.2 C27.2 C28.2 C32.1 C37.2 C38.2 C39.2 C40.2 C41.2 C42.2 C43.2 C44.2 C45.2 C46.2 C47.2 C48.2 C49.2 C60.2 C61.1 C71.2 DBGEN.1 FB1.1 FB2.1 JTAG/DEBUG.1@1720,1960 L3.2 microSD.4 R1.2 R2.2 R6.1 R7.1 R10.1 R12.2 R17.2 R18.2 R21.2 R22.1 R40.1 R41.1 R42.1 R43.1 R44.1 R45.1 TRST.1 U4.13 U5.5 U5.25 U5.36 U5.41 U5.59 U5.71 U5.77 U5.94 U5.107 U5.111 U5.127 U5.131 U5.141 U9.6 | length 8044.9
  Top Layer w10: v1(145.47,1060) 170.47,1085 R40.1@195.94,1085 ; v1(155.47,1430) 185.47,1460 R45.1@195.94,1460 ; v1(155.47,1510) R44.1@195.94,1510 ; v1(195,995) R41.1@195,1034.06 ; R41.1@195.47,1034.53 R41.1@195.94,1035 ; v1(195.47,1175) 195.94,1174.53 R42.1@195.94,1135 ; v1(195.47,1370) 195.94,1370.47 R43.1@195.94,1410 ; C71.2@222.4,1275 380,1275 401.65,1253.35 microSD.4@455.75,1253.35 ; v1(255.47,1230.08) C71.2@255.47,1280.08 ; U9.6@733.32,692.4 733.32,704.84 v1(763.48,735) ; TRST.1@930,1960 890,1920 890,1885 v1(980,1885) ; R22.1@1115.47,1135 v1(1160,1135) ; v1(1145,1915) C28.2@1182.44,1877.56 ; v1(1350,720) 1390,720 1392.24,722.24 U5.71@1465.87,722.24 ; v1(1390,1260) C43.2@1390,1303.19 ; C42.2@1400,947.44 v1(1400,990) ; C42.2@1400,955 1420,955 1423.46,958.46 U5.59@1465.87,958.46 ; 1409.61,1312.8 U5.41@1465.87,1312.8 ; U5.36@1548.15,1476.18 1548.15,1545 v1(1575,1545) ; v1(1575,525) 1612.44,525 C40.2@1615,527.56 ; C40.2@1620,540 1620,550 1629.25,559.25 U5.77@1629.25,612.91 ; JTAG/DEBUG.1@1720,1960 1720.31,1959.69 1820,1959.69 v1(1820,2005) ; C46.2@1750,1550 1767.05,1532.95 U5.25@1767.05,1476.18 ; C46.2@1760,1570 v2(1790,1540) ; v1(1930,515) 1963.9,515 U5.94@1963.9,612.91 ; v1(2140,1555) 2177.44,1555 C45.2@2187.44,1565 2187.44,1534.75 2160.75,1508.06 U5.5@2160.75,1476.18 ; C38.2@2219.8,546.93 U5.107@2219.8,617.91 ; C38.2@2220.31,547.05 v1(2255,547.05) ; U5.111@2324.13,741.93 2371.93,741.93 2385,755 C37.2@2412.44,755 2412.44,777.44 v2(2425,790) ; U5.127@2324.13,1056.89 2381.89,1056.89 2400,1075 C49.2@2420,1075 ; U5.131@2324.13,1135.63 C48.2@2416.81,1135.63 ; U5.141@2324.13,1332.48 C47.2@2402.48,1332.48 ; C47.2@2400,1330 C47.2@2402.48,1332.48 ; C49.2@2420,1077.44 v1(2420,1175) ; v1(2420,1370) 2420,1350 C47.2@2402.48,1332.48 ; R12.2@2754.53,440 v2(2795,440) 2860,440 2880,460 2880,570 v1(2840,610) ; U4.13@2904.17,854.25 2951.06,854.25 2969.16,836.16 2969.16,774.47 C8.2@2940,745.31 C9.2@2940,695.31 2940,695 v1(2905.16,660.16) ; v1@3040.63,700.63 R1.2@3040.63,745.16 ; v1@3199.69,700.63 R2.2@3199.69,745.16
  Top Layer w15: v1(2950,1300) R6.1@2989.53,1300 ; R7.1@3045,1299.53 v1(3045,1335)
  Top Layer w25: C61.1@498.48,788.07 498.48,820 573.48,895 v3(600,895) 620,875 R10.1@655.47,875
  Bottom Layer w10: v2(1540,1810) R17.2@1540,1844.53 ; v2(1730,1810) R18.2@1730,1849.53 ; v1(1940,1230) FB1.1@1940,1276.38 ; v1(2035,1230) FB2.1@2035,1276.38 ; v1(2900,795) 2900,770 2969.84,700.16 v1(3040.16,700.16) v1(3200.16,700.16)
  Bottom Layer w25: v5(205,920) 149.09,920 110,880.91 110,790 48.5,728.5 48.5,307.66 181.16,175 1035,175 1140,280 1736.72,280 1768.72,248 1820.08,248 ; v1(543.48,735) 573.48,765 733.48,765 v1(763.48,735) ; 1820.11,248.03 1859.89,248.03 ; 1859.92,248 1920.08,248 ; 1920.11,248.03 1959.89,248.03 ; 1959.92,248 2020.08,248 ; 2020.11,248.03 2059.89,248.03 ; 2059.92,248 2120.08,248 ; 2120.11,248.03 2264.29,248.03 2349.32,163 2677,163 2740,100 ; 2480,160 2540,100
GND: "Digital IO Higher Byte1.4" "Power & Reset1.6" "Power & Reset1.7" "USB 0.5" C1.1 C2.1 C3.1 C4.1 C5.1 C6.1 C7.1 C8.1 C9.1 C12.1 C13.1 C16.1 C17.1 C18.1 C19.1 C21.1 C23.1 C24.1 C25.1 C27.1 C28.1 C29.1 C30.2 C31.1 C32.2 C35.1 C36.1 C37.1 C38.1 C39.1 C40.1 C41.1 C42.1 C43.1 C44.1 C45.1 C46.1 C47.1 C48.1 C49.1 C51.2 C52.2 C53.1 C54.1 C55.2 C56.1 C57.1 C58.2 C59.1 C60.1 C61.2 C62.1 C63.1 C64.1 C68.1 C71.1 C72.1 C73.1 C74.1 D1.1 D3.1 D4.1 FB3.2 FB4.2 FB6.1 FB12.2 FB13.2 FB14.2 FB15.2 FB16.1 FB17.2 JTAG/DEBUG.3 JTAG/DEBUG.5 JTAG/DEBUG.9 microSD.6 microSD.9 microSD.10 microSD.11 microSD.12 pad.@450,2000 R8.1 R14.1 R16.1 R29.2 R32.2 R33.2 R47.1 Reset.2 STATUS.1 U4.12 U4.21 U5.4 U5.40 U5.76 U5.109 U7.1 U7.4 U7.5 U7.9 U8.1 U8.4 U8.5 U8.9 U9.1 U9.4 U9.5 U9.9 U10.3 X1.2 X1.4 | length 4827.7
  Top Layer w10: v1(60,1230) 60,1255 ; FB12.2@129.17,1630 v1(165,1630) ; 195,1901.18 226.18,1901.18 250,1925 250,2013.78 v1(280.96,2044.74) ; R32.2@291.54,1943.54 v1(291.54,1988.46) ; R33.2@291.79,1759.74 v1(335.96,1759.74) ; v1(325.47,1145) 327.52,1147.05 microSD.11@377.01,1147.05 ; v1(330.47,1400) 374.06,1400 microSD.12@377.01,1402.95 ; C68.1@388.99,1714.27 C68.1@390.96,1712.3 ; microSD.6@455.75,1339.96 455.79,1340 v1(515.47,1340) ; v2(580,2000) STATUS.1@619.13,2000 ; v1(691.79,65) FB16.1@691.79,120 ; v1(845,1820) C27.1@887.56,1820 ; microSD.9@910.47,1145 v1@910.47,1205.08 ; microSD.10@910.47,1434.45 v1(910.47,1490) ; v1(975,940) 1048.11,940 D4.1@1051.61,936.5 ; v1(1020,1135) R47.1@1064.53,1135 ; R14.1@1089.53,1875 1089.53,1899.53 1100,1910 v1(1100,1920) ; v1(1142.44,1822.44) C28.1@1185,1822.44 ; U10.3@1165,1302.48 1165,1260 v1(1190,1235) ; v1(1295,1305) C43.1@1337.44,1305 ; v1(1300,945) C42.1@1342.44,945 ; R16.1@1384.53,1875 1384.53,1894.53 1395,1905 v1(1395,1920) ; v1(1395,620) C41.1@1395,662.44 ; U5.40@1465.87,1332.48 1497.52,1332.48 1510,1320 v1(1535,1320) ; C44.1@1485,1547.44 v1(1485,1590) ; U5.76@1609.57,617.91 1609.57,669.57 v1(1625,685) ; v1(1615,430) C40.1@1615,472.44 ; v2(1705,1640) 1705,1625 C46.1@1725.51,1604.49 ; C32.2@1825,1907.44 v1(1870,1907.44) ; C30.2@1845,1757.56 v1(1845,1800) ; X1.2@1937.52,1710 v1(2000,1710) ; C39.1@1972.44,460 v1(2010,460) ; X1.4@2095,1615.51 v1(2095,1660) ; v1@2180.43,1405 U5.4@2180.43,1476.18 ; C31.1@2192.56,1700 v1(2235,1700) ; v1(2220,472.05) C38.1@2220,507.36 ; C45.1@2240,1567.56 v1(2240,1610) ; U5.109@2324.13,700.2 2381.85,700.2 v2(2400,682.05) ; C47.1@2452.56,1330 v1(2485,1330) ; Reset.2@2468.39,680 v2(2530,680) ; C37.1@2469.69,750 v2(2505,750) ; C49.1@2477.56,1075 2477.56,1130 v1(2525,1130) ; v2(2530,395) C29.1@2530,432.56 ; C35.1@2655,940 v1(2700,940) ; C36.1@2660,1102.56 2662.56,1100 v1(2700,1100) ; v1(2683.62,1173.43) FB6.1@2683.62,1207.05 ; Reset.2@2820,682.72 v2(2820,730) ; U4.12@2904.17,879.84 2950.47,879.84 2985.16,845.16 2985.16,755.28 C8.1@2995.12,745.31 C9.1@2995.12,695.31 v1@2995.12,650.2 ; U4.21@3175.83,982.2 3242.8,982.2 3277.44,947.56 3327.44,947.56 C13.1@3335,940 ; C23.1@3213.31,1570 v1(3255,1570) ; v1(3265,400) 3299.69,400 C2.1@3300,399.68 ; C18.1@3335,797.44 C19.1@3385,797.44 ; C13.1@3335,950 3357.81,972.81 3412.19,972.81 C17.1@3435,950 v1(3480,950) ; FB17.2@3385,1111.18 3431.06,1111.18 C16.1@3435,1115.12 3445.04,1125.16 v1(3495.16,1125.16) ; C19.1@3387.44,795 v1(3430,795) ; v1(3390,505) 3390,470.32 C1.1@3390.31,470 ; FB13.2@3438.78,1215.16 v1(3485.16,1215.16) ; v1(3465,400) 3499.69,400 C4.1@3500,399.68 ; v1(3590,505) 3590,470.32 C3.1@3590.31,470 ; v1(3665,400) 3699.69,400 C6.1@3700,399.68 ; FB14.2@3766.69,1595 FB14.2@3781.69,1580 ; v1(3790,505) 3790,470.32 C5.1@3790.31,470
  Top Layer w15: v1(58.48,950) C58.2@103.48,950 ; R29.2@340.96,1714.27 C68.1@388.99,1714.27 ; C68.1@390.96,1712.3 v1(390.96,1754.74) ; v1(453.48,950) C61.2@503.48,950 ; v1(848.48,950) C55.2@888.48,950 ; v1(1005,1610) 1027.56,1632.56 C62.1@1065,1632.56 C63.1@1115,1632.56 ; C64.1@1222.56,1580 1222.56,1552.44 v1(1265,1510) ; C21.1@2953.31,1500 v1(2995,1500) ; v1(3405,620) FB15.2@3446.69,620 ; v1(3725,1595) FB14.2@3766.69,1595
  Top Layer w25: D1.1@275,939.88 v1(275,990) ; D3.1@655,943.11 v1(655,990) ; v3(745,65) C74.1@820,65 ; C74.1@820,66.85 C7.1@910,66.85 ; C7.1@885,65 C72.1@975,65 ; C72.1@993.48,61.85 C73.1@1083.48,61.85
  Bottom Layer w10: v1(1775,1230) R8.1@1775,1270.47 ; v1(1830,1230) FB3.2@1830,1277.01 ; FB4.2@1883.62,1277.05 FB4.2@1885,1278.43 ; v1(1885,1230) FB4.2@1885,1276.38 ; v1(1985,1255) C25.1@1985,1292.36 ; v1(2080,1250) C24.1@2080,1290.32
  other v1: 2995.16,650.16 910,1205 2180,1405
  other v2: 118.48,510 148.48,510 513.48,510 543.48,510 903.48,510 933.48,510 118.48,540 148.48,540 513.48,540 543.48,540 903.48,540 933.48,540 1178.48,790 1208.48,790 383.48,795 413.48,795 778.48,795 808.48,795 1178.48,820 1208.48,820 383.48,825 413.48,825 778.48,825 808.48,825
  other v4: 312.73,655 344.23,655 707.73,655 739.23,655 1097.73,655 1129.23,655
I2C_CLK: R1.1 U4.17 U5.88 | length 1846.7
  Top Layer w8: U5.88@1845.79,617.91 1845.79,504.21 1855,495 v2(1855,440) ; v2(3067.72,595) 3099.69,626.96 R1.1@3099.69,745.16 3099.69,849.68 3129.84,879.84 U4.17@3175.83,879.84
  Bottom Layer w8: v2(1855,440) 1882.5,412.5 1897.7,412.5 1908.2,402 2465.58,402 2509.08,445.5 2660.5,445.5 2765,550 3022.72,550 v2(3067.72,595)
I2C_DATA: R2.1 U4.16 U5.87 | length 1890.4
  Top Layer w8: U5.87@1826.1,617.91 1826.1,433.9 v2(1860,400) ; v2(3107.72,600) 3140.16,632.44 R2.1@3140.16,745.16 ; R2.1@3135.16,755.16 3135.16,765.16 3115.69,784.63 3115.69,840.68 3129.25,854.25 U4.16@3175.83,854.25
  Bottom Layer w8: v2(1860,400) 1861.5,398.5 1891.9,398.5 1902.4,388 2471.38,388 2514.88,431.5 2666.3,431.5 2770.8,536 3041.9,536 3105.9,600 v2(3107.72,600)
LATCH_ENABLE: U4.15 U5.86 | length 1897.3
  Top Layer w8: U5.86@1806.42,617.91 1806.42,418.58 v2(1820,405) ; v2(3097.72,560) 3115,560 3175.16,620.16 3175.16,827.99 U4.15@3175.83,828.66
  Bottom Layer w8: v2(1820,405) 1823.18,405 1854.18,374 2477.18,374 2520.68,417.5 2672.1,417.5 2776.6,522 3059.72,522 v2(3097.72,560)